# Altium PCB roneCPUBoard-v9.PcbDoc (part 2 of 3)
Units mil, origin at the board's own origin, x right, y up, seen from the top; angles counter-clockwise.
Board outline 3914.93 x 3914.93 mil, 2 copper layers (Top Layer, Bottom Layer); 178 components, 153 nets, 717 pads, 391 vias.
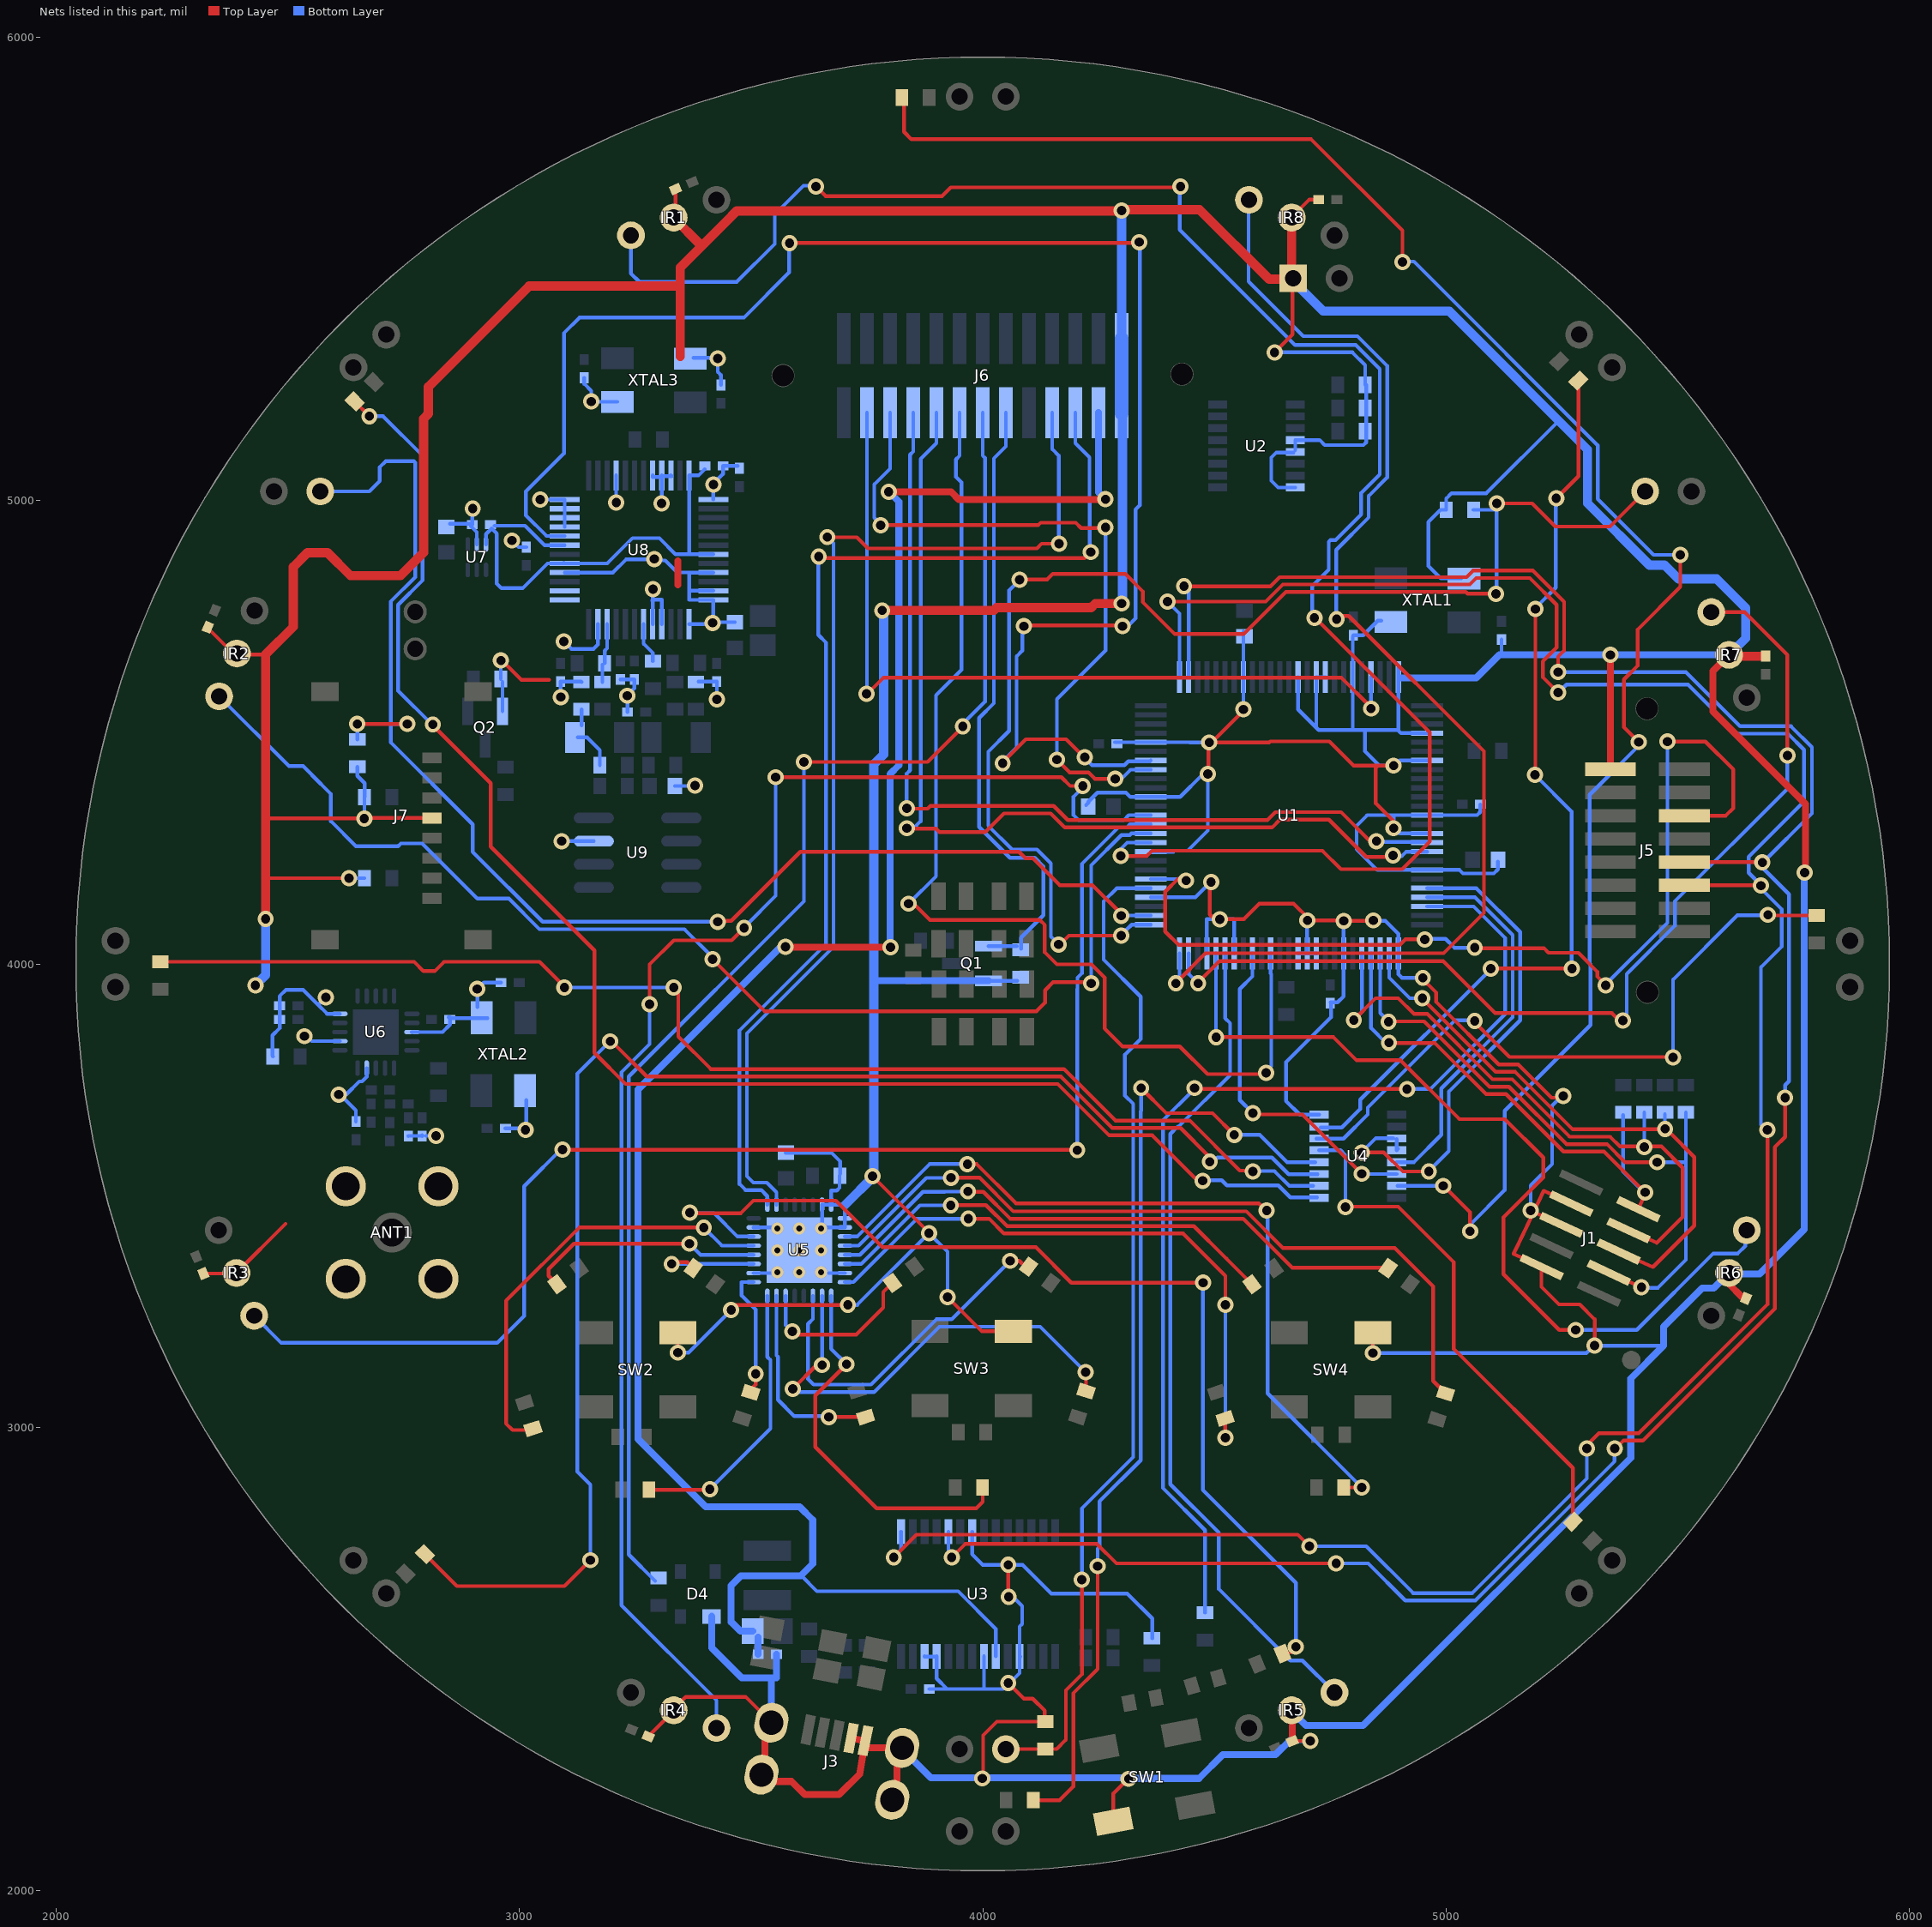
[diagram p2: the nets of this part, all layers, seen from the top]

## Via types
v1: diameter 35, hole 20, Top Layer to Bottom Layer, 374 vias
v2: diameter 25.98, hole 12.99, Top Layer to Bottom Layer, tented top, 13 vias
v3: diameter 110, hole 89, Top Layer to Bottom Layer, 2 vias
v4: diameter 250, hole 89, Top Layer to Bottom Layer, 2 vias

## Nets (pads, with @x,y where several pads share a name; then routed paths per layer and width w, separated by ;. In a path a pad name is that pad's centre, name@x,y a point inside that pad or via, vN(x,y) a via of type N, cw(c..) or ccw(c..) an arc to the next point about the centre after c; other vN are vias at no path point) (continued)
5VUSB: C9.2 J6.24 L1.2 U3.20 | length 4523.3
  Top Layer w15: v1@3575,4036 v1(3801,4036) ; v1(3797,5019) 3932,5019 3948.5,5002.5 v1@4255,5002.5
  Bottom Layer w8: 3607,2681 3608,2680 3642,2646 3947,2646 4028.39,2564.61 U3.20@4028.39,2505.55
  Bottom Layer w15: 3457,2579 3457,2580 ; L1.2@3503.5,2560 3477,2560 3457,2580 ; C9.2@3515.31,2510 L1.2@3515.31,2546.69 ; v1(3574,4037) 3564,4037 3256,3729 3256,2974.33 3402.33,2828 3605,2828 3633,2800 3633,2705 3608,2680 3607,2679 3478,2679 3457,2658 3457,2580 ; v1@3797,5020 3819,4998 3819,4429 3800,4410 3800,4044 3795,4039 3798,4036 v1(3801,4036) ; J6.24@4250,5189.98 4250,5018 v1@4260,5008
  other v1: 4265,5003
ADC_EXPAND: J5.11 U1.6 | length 2158.9
  Top Layer w8: 4421.91,4184 4394,4156.09 4394,4070 4423,4041 4900,4041 4912,4053 4953,4053 4954,4054 v1(4954,4053) ; v1@5064,4034 5211.37,4034 5221.37,4024 5286,4024 5326.5,3983.5 5326.5,3973 v1@5345,3954.5 ; v1(5478,4480) 5560,4480 5620,4420 5620,4336 5604,4320 J5.11@5515.02,4320
  Bottom Layer w8: U1.6@4362.77,4183.2 v1@4433.2,4183.2 ; v1@4433.41,4183 v1@4440,4183 ; v1@4956,4054 4999,4054 5018,4035 v1(5062,4035) ; v1@5344,3954 5344,3955 5478,4089 v1(5478,4480)
  other v1: 5345,3954 4439,4180
CHRG: J6.14 R17.1 | length 3024.4
  Top Layer w8: v1@3612,4436 3881,4436 v1@3958,4513
  Bottom Layer w8: R17.1@3293,2668 3236,2725 3236,3757 3614,4135 3614,4435 v1@3615,4436 ; v1@3957,4514 3957,4518.25 4005,4566.25 4005,5092 4000,5097 J6.14@4000,5189.98
  other v1: 3614,4436 3957,4513
CHRGEN: J6.12 U1.90 | length 2404.3
  Top Layer w8: v1(3840,4130) 3851,4130 3886,4095 4123,4095 4134,4084 4134,4025 4160,3999 4234.72,3999 4263.5,3970.22 4263.5,3860.5 4302,3822 4425.28,3822 4485.28,3762 4609,3762 v1(4612,3765)
  Bottom Layer w8: v1(3840,4130) 3899,4189 3899,4580 3954,4635 3954,5039.28 3942,5051.28 3942,5089 3950,5097 J6.12@3950,5189.98 ; v1(4612,3765) 4610.28,3766.72 4623,3779.43 4623,3978.25 4621.63,3979.62 U1.90@4621.63,4022.77
CVDD: C31.2 C32.2 U7.3 U8.5 U8.7 U8.24 U8.31 | length 1072.9
  Bottom Layer w8: U7.3@2927.69,4905.56 2927.69,4927.69 2940,4940 2951,4929 2951,4821 2961,4811 3007,4811 3060.47,4864.47 U8.5@3097.57,4864.47 ; C32.2@2946,4946 3012,4946 3054.16,4903.84 U8.7@3097.57,4903.84 ; U8.5@3095.79,4866.25 U8.5@3097.57,4864.47 ; 3366.27,4886.27 U8.24@3366.27,5054.43 3386.43,5054.43 C31.2@3400,5068 ; U8.31@3418.43,4884.16 3336.84,4884.16 3302,4919 3244,4919 3189.47,4864.47 U8.5@3097.57,4864.47
DREQ: U1.19 U8.8 | length 3635.7
  Top Layer w8: v1(3583,5556) v1@4347,5556 ; v1(4043,4433) 4043,4435 4093,4485 4180,4485 v1@4220,4445 ; v1@4090,4731 4301.56,4731 4302,4730.56 v1(4302,4729)
  Bottom Layer w8: U8.8@3097.57,4923.53 3058.47,4923.53 3014,4968 3014,5020 3096,5102 3096,5361.63 3129.37,5395 3484.37,5395 3582,5492.63 3582,5557 v1(3583,5556) ; v1(4043,4433) 4043,4437 4073,4467 4073,4663.83 4085.5,4676.33 4085.5,4725.5 v1(4089,4729) ; v1@4219,4446 4236,4429 4306,4429 4314.33,4437.33 4360.99,4437.33 U1.19@4362.77,4439.11 ; v1@4313.56,4729.56 4330,4746 4330,4980.88 4339,4989.88 v1@4339,5555
  other v1: 4220,4446 4338,5558
FTDI_RX: J5.5 U1.26 U3.1 | length 5671.5
  Top Layer w8: v1(3808,2719) 3857,2768 4680,2768 v1(4705,2743) ; v1(4399,4782) 4610.75,4782 4647.75,4819 5051.25,4819 5065.25,4833 5181,4833 5239,4775 5239,4683 5209,4653 5209,4619 v1(5242,4586) ; v1(5304,2954) 5304,2961 5330,2987 5416,2987 5694,3265 v1(5694,3642) ; J5.5@5515.02,4170 v1@5680,4170
  Bottom Layer w8: v1@3807,2719 3823.66,2735.66 U3.1@3823.66,2774.45 ; v1(4399,4782) 4424.78,4756.22 U1.26@4424.78,4619.23 ; v1(4705,2743) 4828,2743 4929,2642 5056.8,2642 5304,2889.2 v1@5304,2955 ; v1(5242,4586) 5243,4586 5260,4603 5522.37,4603 5628.37,4497 5738.26,4497 5773,4462.26 5773,4350.72 5653.5,4231.22 5653.5,4196.5 v1@5681,4169 ; v1@5692,4169 v1(5680,4169) 5680,4162.72 5724.5,4118.22 5724.5,4037.28 5680,3992.78 5680,3653 5691,3642 v1(5694,3642)
FTDI_TX: J5.7 U1.27 U3.5 | length 5478.7
  Top Layer w8: v1(3933.02,2718.98) 3962,2748 4246.72,2748 4288.72,2706 v1(4763,2706) ; v1(4434.5,4815.5) 4438,4819 4442,4815 4621.12,4815 4641.12,4835 5044.63,4835 5058.63,4849 5187.63,4849 5255,4781.63 5255,4676.37 5242,4663.37 v1(5242,4630) ; v1(5364,2954) 5365,2953 5383,2971 5425,2971 5710,3256 5710,3604.63 5732,3626.63 v1(5732,3711) ; J5.7@5515.02,4220 5682,4220 v1(5683,4219)
  Bottom Layer w8: U3.5@3926.02,2774.45 3926.02,2718.98 v1(3933.02,2718.98) ; v1(4434.5,4815.5) 4444.46,4805.54 U1.27@4444.46,4619.23 ; v1(4763,2706) 4832,2706 4912,2626 5063.42,2626 5364,2926.58 v1(5364,2954) ; v1(5242,4630) 5518,4630 5635,4513 5744.89,4513 5790,4467.89 5790,4325 v1@5684,4219 ; v1(5683,4219) 5683,4207.72 5740.5,4150.22 5740.5,3747 5732,3738.5 v1(5732,3711)
GBUF: R47.1 U8.42 | length 88.4
  Bottom Layer w8: U8.42@3267.84,4733.57 3267.84,4691.16 3288,4671 R47.1@3288,4653.53
GND: ANT1.2 ANT1.3 ANT1.4 ANT1.5 C1.1 C2.1 C3.1 C4.1 C5.1 C6.1 C7.1 C8.1 C9.1 C10.1 C11.1 C12.1 C13.1 C14.1 C15.1 C16.1 C17.1 C18.1 C19.1 C21.1 C23.1 C24.1 C25.1 C26.1 C27.1 C28.1 C29.1 C30.2 C31.1 C32.1 C33.2 C34.1 C36.1 C37.1 C38.2 C39.2 C40.2 C41.2 C42.1 C43.2 C46.1 D4.1 IR1.2 IR2.2 IR3.2 IR4.2 IR5.2 IR6.2 IR7.2 IR8.2 J1.3 J1.5 J1.9 J3.4 J3.5 J3.6 J3.7 J3.8 J3.9 J4.1 J5.16 J6.25 J6.26 J7.4 Q1.2 Q2.2 R2.1 R3.1 R10.1 R11.1 R12.1 R18.1 R32.1 R33.1 R39.2 R40.2 R41.2 R43.1 R54.1 R55.1 R57.1 SW1.2 SW2.2 SW3.2 SW4.2 U1.4 U1.9 U1.15 U1.21 U1.33 U1.39 U1.41 U1.42 U1.45 U1.50 U1.54 U1.57 U1.63 U1.65 U1.69 U1.76 U1.82 U1.85 U1.86 U1.87 U1.94 U1.97 U2.4 U2.5 U2.8 U3.7 U3.18 U3.21 U3.25 U3.26 U4.8 U5.1 U5.2 U5.7 U5.18 U5.23 U5.31 U5.32 U5.33 U6.8 U6.14 U6.17 U6.20 U7.2 U8.4 U8.9 U8.10 U8.11 U8.12 U8.16 U8.20 U8.21 U8.22 U8.25 U8.33 U8.35 U8.36 U8.37 U8.40 U8.41 U8.47 U9.7 XTAL1.2 XTAL1.4 XTAL2.2 XTAL2.4 XTAL3.2 XTAL3.4 | length 31835.3
  Top Layer w8: C13.1@2317.53,3331.81 IR3.2@2385.81,3331.81 ; C12.1@2327.47,4724.53 2382,4670 2385.27,4670.73 2389,4667 2389.5,4668.5 IR2.2@2390,4670 ; IR3.2@2389,3333 2495,3439 ; IR2.2@2391,4668 2452,4668 2455,4668 ; 2453,4185 v1(2632,4185) ; 2455,4314 v1(2665,4314) 2665.88,4314.88 J7.4@2811.02,4314.88 ; v1@2960,4661 2960,4657 3004,4613 3064,4613 ; C14.1@3278.19,2332.47 IR4.2@3330,2384.28 ; IR4.2@3331,2390 3359,2418 3488.07,2418 J3.6@3543.89,2362.17 ; IR1.2@3336.81,5613.81 C11.1@3336.81,5672.47 ; v1(3342,3161) SW2.2@3342,3198 ; v1(3457,3253) 3468,3264 v1(3709,3264) ; J3.4@3715.93,2329.04 J3.4@3715.93,2347 ; v1(3762,3542) 3885,3419 v1(3884,3419) ; v1(3924,3281) 3998,3207 SW3.2@4066,3207 SW3.2@4068,3207 ; v1@4001,2251 4001,2335 4030.53,2364.53 R41.2@4135,2364.53 ; v1(4055,2448) 4089,2414 4108,2414 4134,2388 R41.2@4134,2365 ; v1(4055,2703) 4055,2635 v1(4056,2634) ; SW1.2@4281.75,2149.42 4281.75,2209.25 v1@4314.5,2242 ; v1@4487,4406 v1@4487,4480 ; v1@4488,4478 v1(4489,4478) v1@4494,4478 ; v1(4493,4177) 4492,4177 4490,4175 4490,4107 v1@4503,4094 ; v1(4512,4096) 4513,4097 4564,4097 4597,4130 4671,4130 v1@4705,4096 ; v1(4562.57,4549.43) 4562.57,4546.57 v1@4494,4478 ; v1(4630,5320) 4669,5359 4669,5479 J4.1@4669,5481 ; C15.1@4662,2323 v1(4707,2323) ; IR8.2@4667,5612 4705,5650 C17.1@4725.32,5650 ; v1@4702,4094 4778,4094 v1(4779.11,4092.89) v1@4844.11,4092.89 ; v1(4842,3160) SW4.2@4842,3204 ; v1@4887,4298 4887,4308 4848.5,4346.5 4848.5,4423.5 4853,4428 ; v1@4887,4422 v1(4887,4428) 4853,4428 ; v1(4950,3970) 4947,3970 4979,3938 4979,3917.88 5113.88,3783 5156.14,3783 5227.77,3711.36 5246.36,3711.36 5250,3715 v1(5253,3715) ; v1(5183,3468) 5183,3473 v1@5189.98,3466.02 ; v1@5190,3464 J1.5@5249.27,3436.78 ; v1@5191,3465 v1@5189.98,3466.02 ; J1.9@5206,3345 5206,3303 5244,3265 5289,3265 5321,3233 v1(5321,3176) ; J1.9@5206.68,3345.44 5206.29,3345.62 5146,3374 5189.2,3464.38 5189.45,3464.92 v1@5189.98,3466.02 ; J1.3@5270.57,3482.46 5211,3510 v1@5189.98,3466.02 ; v1@4494,4478 4618.28,4478 4620.78,4480.5 4748.22,4480.5 4800.72,4428 4853,4428
  Top Layer w15: 3342,4818 3342,4870 ; J3.7@3522.3,2250.06 J3.7@3523,2250.06 ; J3.6@3523,2341.28 3530,2348.28 3530,2239 3533.5,2235.5 3587.08,2235.5 3615.58,2207 3690,2207 3734,2251 3746.75,2322.51 J3.5@3746.86,2323.09 3746.86,2307.83 J3.9@3815,2307.83 ; J3.4@3715.93,2329.04 J3.5@3744,2323 ; J3.8@3805,2195.71 J3.8@3804.52,2195.71 3815,2206.2 J3.9@3815,2307.83 ; J3.9@3826.11,2307.83 J3.9@3815,2307.83 ; v1@4301,5625 v1@4301,5628 ; C15.1@4668,2329 IR5.2@4668,2390 ; J5.16@5354.98,4420 v1(5355,4667) ; IR7.2@5608,4664 5576,4632 5576,4545 5776,4345 v1@5776,4191 ; IR6.2@5611,3333 5611,3309 5639,3281 C16.1@5646,3281
  Top Layer w20: v1(2452,4097) 2452,4668 2512,4728 2512,4857 2542.5,4887.5 2585.7,4887.5 2635.2,4838 2743,4838 2793,4888 2793,5176.8 2803.5,5187.3 2803.5,5245.5 3021,5463 3347,5463 ; IR1.2@3333,5610 3390,5553 ; 3347,5311 3347,5463 ; v1(3783,4763) 4024,4763 4030,4769 4234,4769 4243,4778 v1(4300,4778) ; v1@4301,5625 3469,5625 3445.27,5601.27 3347,5503 3347,5463 ; v1@4301,5628 4468,5628 4618,5478 J4.1@4667,5478 ; IR8.2@4655,5611 IR8.2@4667,5611 J4.1@4667,5478 ; J4.1@4670,5480 4669,5479 4667,5477 J4.1@4667,5478 ; IR7.2@5608,4664 C18.1@5682,4664
  Bottom Layer w8: IR3.2@2385.81,3331.81 2386.59,3332.1 IR3.2@2389,3333 ; R43.1@2467.47,3800 2467,3803 2467,3846 2482.31,3861.31 C28.1@2482.31,3880 C21.1@2482.31,3910 2482.31,3930.31 2496,3944 2533,3944 2566,3911 ; v1(2536,3844) 2539,3846 2551.68,3833.32 U6.17@2612.24,3833.32 ; v1(2582,3928) 2566,3912 2566,3911 ; v1(2610,3718) 2626,3718 2654.51,3746.51 2660.2,3746.51 2670.31,3756.62 U6.14@2670.31,3775.24 ; U6.20@2612.24,3892.37 2584.63,3892.37 2566,3911 ; v1@2614,3717 2647,3684 C23.1@2647,3659.69 ; v1(2632,4185) R2.1@2665.47,4185 ; R39.2@2650,4425.47 2650,4406 2666,4390 R3.1@2666,4361 ; v1@2665.47,4318.53 R3.1@2665.47,4360 ; C24.1@2760,3628.32 2760,3629 2789,3629 2790,3630 C25.1@2790,3628.32 ; U6.8@2768.76,3852 U6.8@2767.76,3853 2834,3853 2850,3869 C29.1@2850,3885 ; C25.1@2798,3629 v1(2820,3629) ; C29.1@2846.68,3885 2851.68,3883 XTAL2.4@2931,3883 ; C30.2@2850,4950 2897,4950 C32.1@2898.32,4948.68 ; v1(2899,4983) 2898.32,4974.32 C32.1@2898.32,4948.68 ; U7.2@2908,4905.56 2908,4932 2895.16,4944.84 C32.1@2898.32,4948 C32.1@2898.32,4948.68 ; XTAL2.4@2909,3907 v1(2909,3946) 2923,3960 C26.1@2960.31,3960 ; R57.1@2959.53,4615 v1@2959.53,4650.53 ; Q2.2@2963.4,4545.43 R57.1@2963.4,4608.6 ; C27.1@2969.68,3645 v1@3008,3645 ; v1(2984,4914) 2998.31,4899.69 C37.1@3015,4899.69 ; v1@3014.74,3654.74 XTAL2.2@3014.74,3706.26 ; v1(3044.73,5002.27) U8.12@3097.57,5002.27 U8.9@3097.57,4943.21 ; v1(3089,4576) C38.2@3089,4609.31 3132.69,4609.31 R54.1@3134,4608.53 ; v1(3091,4265) U9.7@3160.51,4265 ; v1(3096,4696) 3112,4680 3160,4680 3169.42,4689.42 U8.47@3169.42,4733.57 ; U8.4@3097.57,4844.79 3201.79,4844.79 3230,4873 3289,4873 v1(3291,4874) 3292.5,4871 3314.72,4871 3340.72,4845 3366.27,4845 3366.27,4844.79 ; C43.2@3140,5265.31 3140,5252 3155,5237 v1@3155,5217 ; v1@3155.74,5213.26 XTAL3.2@3211.26,5213.26 ; U8.16@3208.79,5054.43 3208.79,4999.21 3209,4999 v1(3209,4996) ; C42.1@3218,4614.32 C34.1@3246.69,4614.32 ; C40.2@3233.31,4544 3233.31,4573.69 v1(3233,4579) 3233,4580 3248,4595 C34.1@3248,4614.32 ; U8.41@3287.53,4733.57 3287.53,4783.73 ; U8.20@3287.53,5054.43 3288,5051 3307,5051 3307,5054.43 U8.21@3307.21,5054.43 ; v1(3288,4809) 3287.53,4804.47 3287.53,4789 3287,4783.73 3287.53,4783.73 ; v1(3307,4994) 3307.21,4994 U8.21@3307.21,5054.43 ; U8.40@3307.21,4733.57 3307.21,4785.79 3307,4786 3287.53,4786 3287.53,4783.73 ; U8.22@3326.9,5054.43 3328.68,5053 3308.65,5053 U8.21@3307.21,5054.43 ; C46.1@3335.56,4384 3378,4384 v1(3379,4385) ; v1(3342,3161) 3365,3161 v1(3457,3253) ; U8.37@3366.27,4733.57 3415.57,4733.57 3418,4737 3418,4737.56 C33.2@3465,4737.56 ; XTAL3.4@3376,5308 3428,5308 3428,5278 3435,5271 C41.2@3435,5249.69 ; R55.1@3386.31,4609.31 C39.2@3426,4609.31 v1(3426,4571) ; v1(3417,4736.13) 3418.43,4737.57 U8.36@3418.43,4785.73 3366.73,4785.73 3366.73,4805.42 ; U8.35@3418.43,4805.42 3366.73,4805.42 ; U8.33@3418.43,4844.79 3366.27,4844.79 ; U8.25@3418.43,5002.27 3418.43,5028.43 v1(3419,5035) 3419,5037 3439.69,5057.69 C31.1@3439.69,5075 C36.1@3471,5075 ; U5.18@3505.57,3332.79 U5.33@3555.79,3332.79 ; U5.23@3505.57,3431.21 U5.33@3544.79,3431.21 ; C19.1@3575,3592.56 3673.44,3592.56 3692,3574 R33.1@3692,3547 ; U5.33@3653.21,3443.79 U5.31@3653.21,3480.43 ; U5.31@3655.57,3480.43 U5.32@3672.9,3480.43 ; U5.33@3662.21,3431.21 U5.2@3702.43,3431.21 ; U5.33@3667.79,3332.79 U5.7@3702.43,3332.79 ; R33.1@3691,3543 3691,3517 3684.9,3510.9 3672.9,3510.9 U5.32@3672.9,3480.43 ; U5.2@3702.43,3431.57 U5.1@3702.43,3450.9 3702.43,3478.43 ; 3703.57,3480.43 3703.43,3480.43 U5.32@3672.9,3480.43 ; v1(3709,3264) 3729,3264 v1(3884,3419) 3924,3379 v1(3924,3281) ; v1(3762,3542) v1@3765,3542 ; U3.26@3874.84,2505.55 3874.84,2505 U3.25@3900.43,2505 ; C10.1@3884.69,2435 4044,2435 4053,2444 4058,2445 v1(4055,2448) ; U3.25@3900.43,2505.55 U3.25@3900.43,2505 ; 3923,2435 3900.43,2457.57 U3.25@3900.43,2505 ; U3.7@3977.2,2774.45 3977.2,2725.8 4000,2703 4086,2703 4148,2641 4312,2641 4366,2587 R18.1@4366,2544 ; 4002.8,2435 U3.21@4002.8,2505.55 ; Q1.2@4012.43,3963.6 R32.1@4074.6,3963.6 ; v1(4056,2634) 4058,2634 4061,2631 4068,2631 4085,2614 4085,2575.28 4079.57,2569.85 U3.18@4079.57,2505.55 ; v1@4059.57,2449 4079.57,2469 4079.57,2503.57 U3.18@4081,2505 ; C7.1@4223,4343 4228,4348 4228,4350.28 4247.44,4369.72 4309.28,4369.72 4318.63,4360.37 4426.37,4360.37 4474,4408 v1@4484,4408 ; C1.1@4285.52,4478.48 4446.52,4478.48 ; U1.4@4362.77,4143.83 4451.17,4143.83 ; U1.9@4362.77,4242.26 4412.01,4242.26 ; 4414.25,4244.5 4442.5,4244.5 4486,4288 v1@4486,4408 ; 4447,4478 v1(4489,4478) ; 4453,4144 4459,4144 4492,4177 v1(4493,4177) ; U1.97@4483.83,4022.77 4483.83,4097 v1@4513,4097 ; v1(4512,4096) v1@4513,4097 ; U1.94@4542.89,4022.77 4542.89,4096.11 4542,4097 v1@4513,4097 ; v1(4562.57,4549.43) C3.1@4562.57,4717.57 ; v1(4630,5320) 4798,5320 4825.53,5292.47 R12.1@4825.53,5250 ; IR5.2@4667,2389 4667.93,2388.36 4668.19,2388.19 IR5.2@4668.19,2385.81 ; IR8.2@4667,5611 IR8.2@4667,5612 ; 4671,2323 4668.19,2322.53 4707.47,2322.53 v1(4707,2323) ; U2.5@4671,5104 4634,5104 4623,5093 4623,5043 4637.57,5028.43 U2.8@4674.66,5028.43 ; U2.5@4674.66,5109.34 U2.4@4674.66,5130.8 4727.2,5130.8 4738,5120 4822,5120 4828,5126 R12.1@4828,5250 ; U1.87@4680.69,4022.77 U1.86@4700.37,4022.77 ; 4680.69,4549.31 4725,4505 4798.8,4505 ; 4680.69,4551.06 U1.39@4680.69,4619.23 ; v1@4700.37,4090.37 U1.86@4700.37,4022.77 ; U1.85@4720.06,4022.77 U1.86@4700.37,4022.77 ; 4720.06,4510.06 U1.41@4720.06,4619.23 ; U1.41@4721.77,4619.23 U1.42@4739.74,4619.23 ; U4.8@4726.34,3674.57 4684.43,3674.57 4655,3704 4655,3788 4752,3885 C2.1@4752,3912 ; C2.1@4751,3917 4766,3917 4779.11,3930.11 v1(4779.11,4092.89) ; v1(4842,3160) 5303,3160 v1@5319,3176 ; v1@4843,4093 4869,4093 4897.22,4064.78 4897.22,3977.78 4905,3970 v1(4950,3970) ; XTAL1.4@4860,4741 4853,4741 4821.31,4709.31 C5.1@4800,4709.31 4798.8,4704.8 4798.8,4505 ; v1@4887,4309 4887,4321 ; 4897,4507 4897,4505 ; 4897.22,4505 U1.50@4897.22,4644 ; v1@4900,4281.63 U1.65@4959.23,4281.63 ; 4900.5,4439.5 v1@4900.11,4439.11 ; U1.57@4959.23,4439.11 v1@4900.11,4439.11 ; U1.54@4959.23,4498.17 4902.83,4498.17 4897,4504 4897,4505 ; XTAL1.2@5033,4832 4989,4832 4962,4859 4962,4954 4988,4980 R40.2@5000.47,4980 5000.47,5004.47 5012,5016 5087,5016 5243,5172 ; C8.1@5074,4344 5074,4328 5067,4321 U1.63@4959.23,4321 4887,4321 ; C4.1@5112,4221 5112,4204 5103.28,4195.28 5036.72,4195.28 5029.11,4202.89 4851.74,4202.89 4807,4247.63 4807,4298 4830,4321 4887,4321 ; 5120,4670 C6.1@5120,4700.31 ; v1(5183,3468) 5183,3522 5229,3568 5229,3694 5250,3715 v1(5253,3715) ; v1(5321,3176) 5470,3176 ; IR6.2@5611,3333 IR6.2@5613,3331 ; 3366.27,4844.79 3366.27,4805.42 3366.73,4805.42 ; 4798.8,4505 4825,4505 ; 4825,4505 4825,4459 4856,4428 4883,4428 4886,4425 v1(4887,4428) v1@4900.11,4439.11 ; 4825,4505 4897,4505
  Bottom Layer w15: D4.1@3415,2591.77 3415,2524 3480,2459 3554.68,2459 C9.1@3554.68,2510 ; J3.6@3543.89,2362.17 3543.89,2459 ; 3703,3480 3703.43,3480.43 ; 3767.4,3963.6 Q1.2@4012.43,3963.6 ; J3.9@3825,2306 3888,2243 4313,2243 v1(4315,2241) ; v1@4314.5,2242 4467,2242 4518,2293 4632,2293 4668,2329 IR5.2@4668,2384 ; IR5.2@4667,2387 4668.19,2385.81 4698,2356 4821,2356 5399,2934 5399,3105 5470,3176 5470,3217 5553,3300 5578,3300 IR6.2@5611,3333 ; U1.50@4902,4617 5065,4617 5115,4667 v1(5355,4667) IR7.2@5611,4667 ; IR6.2@5610,3331 5613,3331 5677,3331 5773,3427 v1@5773,4195
  Bottom Layer w20: v1(2430,3954) 2452,3976 v1(2452,4097) ; 3703.43,3480.43 3765,3542 3765,4431 3786,4452 v1@3786,4763 ; J6.26@4300,5189.98 4301.5,5188.48 v1@4301.5,4779.5 ; J6.25@4300,5350.02 v1(4300,5626) v1@4300,5632 ; J4.1@4670,5480 4670,5474 4735,5409 5006.77,5409 5305.5,5110.27 5305.5,4994.5 5439,4861 5471.89,4861 5501.89,4831 5584,4831 5647,4768 5647,4703 IR7.2@5619,4675
  Bottom Layer w29.12: J6.26@4300,5187.98 J6.26@4300,5189.98 J6.25@4300,5350.02
  other v1: 3999,2242 3013,3642 4701,4094 4843,4094 5774,4197 4887,4293 4486,4410 2960,4655 3155,5214 3428,5307
  other v2: 3556.76,3334.76 3604,3334.76 3651.24,3334.76 3556.76,3382 3604,3382 3651.24,3382 3556.76,3429.24 3604,3429.24 3651.24,3429.24
I2C_SCL: J6.22 U5.25 | length 2440.4
  Top Layer w8: v1@3643.51,4874.49 3645.03,4876 4220,4876 v1(4233,4889)
  Bottom Layer w8: 3475,3559 3475,3560 ; U5.25@3535.1,3480.43 3535.1,3498.9 3522,3512 3488,3512 3475,3525 3475,3560 ; v1(3646,4879) 3645,4878 3645,4710.35 3662,4693.35 3662,4043.63 3475,3856.63 3475,3560 ; J6.22@4200,5189.98 4200,5124 4230.5,5093.5 4230.5,5019.72 4230.5,4995.28 4231,4994.78 4231,4891 4230.5,4890.5 4231.5,4890.5 v1(4233,4889)
I2C_SDA: J6.20 U5.26 | length 2351.1
  Top Layer w8: v1@3667,4921 3728.37,4921 3752.37,4897 4117,4897 4127,4907 v1@4148,4907
  Bottom Layer w8: U5.26@3554.79,3480.43 3554.79,3507.22 3534,3528 3505,3528 3491,3542 3491,3850 3678,4037 3678,4908 v1@3664,4922 ; J6.20@4150,5189.98 4150,5111.35 4164,5097.35 v1@4164,4908
  other v1: 4165,4907 3664.5,4921.31
IR_CLK: U1.71 U4.11 U4.12 | length 1113.2
  Top Layer w8: v1(4818,3593) 4866,3593 4907,3552 v1(4963,3552)
  Bottom Layer w8: v1(4818,3593) 4818,3601 4825.72,3601 4848.72,3624 U4.11@4886,3624 ; U4.11@4893.66,3621.66 U4.12@4893.66,3597.8 U4.12@4897,3601.13 ; U1.71@4959.23,4163.52 5065.48,4163.52 5160,4069 5160,3878.37 5006,3724.37 5006,3596 4964,3554 v1@4963,3554
IR_DATA: U1.92 U4.14 | length 730.5
  Top Layer w8: v1@4583,3675 4690,3675 4815,3550 v1@4815,3540
  Bottom Layer w8: U1.92@4582.26,4022.77 4582.26,3973.26 4555,3946 4555,3706 v1(4583,3678) ; v1@4824.61,3546.61 U4.14@4893.66,3546.61
  other v1: 4818,3547
IR_EMIT_0: R24.2 U4.15 | length 4143.9
  Top Layer w8: R24.2@3825.47,5870 3830,5865.47 3830,5796 3846,5780 4709,5780 4906,5583 v1(4906,5515) ; v1@4994,3522 5052,3464 v1(5052,3423) ; v1(5416,4479) 5384,4511 5384,4614 5414,4644 5414,4722 5506,4814 v1(5506,4883)
  Bottom Layer w8: U4.15@4895.76,3521 v1(4994,3521) ; v1(4906,5515) 4905,5516 4930.89,5516 5327.5,5119.39 5327.5,5003.61 5448.11,4883 v1(5506,4883) ; v1@5053,3420 5053,3438 5127,3512 5127,3683 5312,3868 5312,3999 5310,4001 5310,4365 5420,4475 v1(5416,4479)
IR_EMIT_1: R25.2 U4.1 | length 3363.5
  Top Layer w8: R25.2@2644.12,5214.12 v1(2676,5182.24) ; v1(2813,4517) 2813,4515 2938,4390 2938,4253 3162,4029 3162,3808 3229,3741 4162.03,3741 4273.03,3630 4366,3630 4462,3534 v1@4477,3534
  Bottom Layer w8: v1(2676,5182.24) 2705.39,5182.24 2791,5096.63 2791,4828.33 2738,4775.33 2738,4589.72 v1@2811.36,4516.36 ; v1@4484,3533 4516,3533 4527,3522 4638,3522 4664,3496 U4.1@4722,3496
  other v1: 4475,3532
IR_EMIT_2: R26.2 U4.2 | length 2737.6
  Top Layer w8: R26.2@2225,4004.53 2772.75,4004.53 2792.78,3984.5 2817.22,3984.5 2837.25,4004.53 3043.47,4004.53 3086,3962 v1@3086,3954 ; v1@3343,3938 3343,3843 3413,3773 4175.28,3773 4286.28,3662 4447,3662 4555,3554 4575,3554 v1@4582,3547
  Bottom Layer w8: v1@3096,3949 v1@3327,3949 ; v1@4582,3547 4588,3553 4629.63,3553 4661.63,3521 U4.2@4713,3521
  other v1: 4583,3552 3097,3949 3333,3949
IR_EMIT_3: R27.2 U4.3 | length 3228.5
  Top Layer w8: R27.2@2795.88,2725.88 2864.76,2657 3097,2657 v1(3153,2713) ; v1@3204,3828 3275,3757 4168.65,3757 4279.65,3646 4427,3646 4487,3586 v1@4486,3568
  Bottom Layer w8: v1(3153,2713) 3153,2876 3125,2904 3125,3763 v1@3203,3841 ; v1@4496,3571 4507,3582 4624.37,3582 4660.37,3546 U4.3@4723,3546
  other v1: 4490,3573 3196,3833
IR_EMIT_4: R28.2 U4.4 | length 2107.5
  Top Layer w8: R28.2@4109.53,2195 4166,2195 4195.49,2224.49 4195.49,2425.49 4248,2478 v1@4248,2699 ; v1(4342,3732) 4396,3678 4496,3678 v1(4543,3631)
  Bottom Layer w8: v1@4247,2700 4248,2701 4248,2738 4252,2742 4252,2839.86 4341,2928.86 4341,3681.88 4342,3682.88 4342,3730 v1@4343,3731 ; v1(4543,3631) 4598,3631 4657,3572 U4.4@4718,3572
  other v1: 4248,2700
IR_EMIT_5: R29.2 U4.5 | length 1117.5
  Top Layer w8: v1@4785,3476 4897,3476 5017,3356 5017,3169 5274.12,2911.88 R29.2@5274.12,2795.88
  Bottom Layer w8: U4.5@4726.34,3597.8 4772.2,3597.8 4783,3587 v1@4783,3479
  other v1: 4783,3475
IR_EMIT_6: R30.2 U4.6 | length 1473.9
  Top Layer w8: v1@5061,3875 5137,3799 5477,3799 5489,3787 v1@5489,3790 ; v1@5701,4104.53 R30.2@5800,4104.53
  Bottom Layer w8: U4.6@4720,3623 4779,3623 4831,3675 4831,3690 5019,3878 v1@5062,3878 ; v1@5489,3790 5489,3787 5490,3788 5490,3966 5629,4105 v1@5701,4105
  other v1: 5490,3798 5062,3877 5695,4106
IR_EMIT_7: R31.2 U4.7 | length 2026
  Top Layer w8: v1(5097,3990) v1@5255.75,3990 ; v1(5192,4408) 5193,4409 v1(5193,4766) ; v1(5238,5005) 5240,5005 5240,5015 5248,5015 5285.88,5052.88 R31.2@5285.88,5259.12
  Bottom Layer w8: U4.7@4730,3647 4775,3647 4815,3687 4815,3707 v1@5097.5,3989.5 ; v1(5192,4408) 5271,4329 v1@5271,3989 ; v1(5193,4766) 5193,4768 5237,4812 v1@5237,5004
  other v1: 5272,3990
IR_RECV_0: IR1.1 U1.10 | length 4054.1
  Top Layer w8: v1(3640,5678) 3661,5657 3912,5657 3931,5676 v1@4434,5676 ; v1(4298,4233) 4354,4233 4365.5,4244.5 4733.22,4244.5 4773.22,4204.5 4905.5,4204.5 4965,4264 4965,4500 v1@4711,4754
  Bottom Layer w8: IR1.1@3240.61,5572.73 3240.61,5490.39 3259,5472 3469,5472 3551,5554 3551,5618 3613,5680 v1@3647,5680 ; v1@4298,4248 4311.94,4261.94 U1.10@4362.77,4261.94 ; v1@4425,5676 4425,5585 4674,5336 4805.37,5336 4857,5284.37 4857,5056.63 4817,5016.63 4817,4970.37 4761.63,4915 4750.63,4915 4747,4911.37 4747,4851 4711,4815 v1@4711,4754
  other v1: 4716,4747 4427,5678
IR_RECV_1: IR2.1 U1.11 | length 2660.4
  Top Layer w8: v1(3417,4010) 3529,3898 4116,3898 4134.5,3916.5 4134.5,3943.22 4151.78,3960.5 v1@4231.5,3960.5
  Bottom Layer w8: IR2.1@2351.73,4577.61 2502.34,4427 2533,4427 2552,4408 2552,4407.72 2593,4366.72 2593,4308 2647,4254 2738,4254 2744,4260 2790,4260 2909,4141 2977.12,4141 3043.12,4075 3356,4075 v1@3422,4009 ; v1@4235,3958 4234,3959 4234,4213 4299.28,4278.28 4317.54,4278.28 4320.88,4281.63 U1.11@4362.77,4281.63
  other v1: 4234,3958
IR_RECV_2: IR3.1 U1.12 | length 2949.3
  Top Layer w8: v1@3091,3599 v1@4203,3599
  Bottom Layer w8: IR3.1@2427.27,3240.61 2485.88,3182 2952,3182 3010,3240 3010,3520 v1@3095,3605 ; v1(4204,3598) 4204,3945.28 4204.5,3945.78 4204.5,3970.22 4214,3979.72 4214,4215.63 4292.66,4294.28 4310.91,4294.28 4317.94,4301.31 U1.12@4362.77,4301.31
  other v1: 3093,3599
IR_RECV_3: IR4.1 U1.13 | length 3262.2
  Top Layer w8: v1@3281,3914 3281,3999 3333,4051 3458,4051 v1(3485,4078) ; v1(3553,4403) 4170,4403 4189,4384 4212,4384 4216,4380 v1(4216,4384)
  Bottom Layer w8: v1@3281,3912 3281,3827 3220,3766 3220,2616 3425.39,2410.61 IR4.1@3425.39,2350.73 ; v1@3489,4083 3553,4147 v1(3553,4403) ; v1@4214.5,4383.5 4214.5,4379.5 4196,4361 4196,4321 4206.72,4310.28 4304.28,4310.28 4315,4321 U1.13@4362.77,4321
  other v1: 3281,3913
IR_RECV_4: IR5.1 U1.95 | length 1816.8
  Bottom Layer w8: U1.95@4523.2,4022.77 4523.2,3882.8 4534,3872 4534,3760 4423,3649 4421,3649 4405,3633 4405,2877 4509.72,2772.28 4509.72,2650.56 4663.78,2496.5 4690.16,2496.5 IR5.1@4759.39,2427.27
IR_RECV_5: IR6.1 U1.96 | length 1964.6
  Top Layer w8: v1(4504,3842) 4757,3842 4807,3792 4902,3792 5029,3665 5127,3665 5210,3582 5210,3539 5124,3453 5124,3330.26 5244.26,3210 v1(5280,3210)
  Bottom Layer w8: U1.96@4503.52,4022.77 4503.52,3842.48 v1(4504,3842) ; v1(5280,3210) 5412,3210 5577,3375 5630,3375 5646,3391 5646,3422.12 IR6.1@5649.27,3425.39
IR_RECV_6: IR7.1 U1.99 | length 2214.2
  Top Layer w8: v1(4465,3958) 4465,3960 4511,4006 4994,4006 5106,3894 5358,3894 v1@5382,3870 ; IR7.1@5572.73,4759.39 5644.61,4759.39 5737,4667 v1(5737,4450)
  Bottom Layer w8: U1.99@4444.46,4022.77 4444.46,3978.54 v1(4465,3958) ; v1@5382,3870 5390,3878 5390,3978.37 5494,4082.37 5494,4135 5737,4378 v1(5737,4450)
  other v1: 5382,3878
IR_RECV_7: IR8.1 U1.100 | length 2756.5
  Top Layer w8: v1@4416,3958 4481,4023 4995,4023 5082,4110 5082,4459 4790,4751 4757,4751 v1(4764,4744)
  Bottom Layer w8: v1@4417,3959 4424.78,3966.78 U1.100@4424.78,4022.77 ; IR8.1@4567.73,5649.27 IR8.1@4574.61,5649.27 4574,5648.66 4574,5473 4692,5355 4809,5355 4873,5291 4873,5050 4833,5010 4833,4963.75 4763,4893.75 4763,4757 4757,4751 v1(4764,4744)
  other v1: 4417,3958
JTAG_TCK: J1.4 R5.1 U1.80 | length 1362.4
  Top Layer w8: v1(4801,3879) 4848,3926 4897,3926 4931,3892 4959.63,3892 5100.63,3751 5142.88,3751 5266.88,3627 5354.25,3627 5375.25,3606 5465,3606 5511,3560 5511,3454 5455,3398 J1.4@5394.03,3424.89
  Bottom Layer w8: v1(4801,3879) 4818.48,3896.48 U1.80@4818.48,4022.77 ; v1@5428,3601 R5.1@5428,3679.47
  other v1: 5428,3605
JTAG_TDI: J1.8 R7.1 U1.78 | length 1438.3
  Top Layer w8: v1@4876,3876 4953,3876 5094,3735 5136.25,3735 5260.25,3611 5347.63,3611 5386.63,3572 5454,3572 v1@5456,3570 ; J1.8@5351.43,3333.54 v1@5420,3303
  Bottom Layer w8: U1.78@4857.85,4022.77 4857.85,3894.15 v1@4876,3876 ; v1@5421,3301 5457.75,3301 5518,3361.25 5518,3572 ; v1(5456,3572) 5518,3572 ; R7.1@5518,3679.47 5518,3572
  other v1: 5422,3302 4876,3875
JTAG_TDO: J1.6 R6.1 U1.77 | length 1283
  Top Layer w8: v1(4949,3926) 4949,3925.25 5107.25,3767 5149.51,3767 5273.51,3643 5465,3643 5472.5,3635.5 5473,3636 v1(5473,3644) ; J1.6@5372.73,3379.22 5447,3346 5536,3435 5536,3583 5483,3636 v1@5474,3636
  Bottom Layer w8: U1.77@4877.54,4022.77 4877.54,3970.46 4922,3926 v1(4949,3926) ; R6.1@5472.5,3675.5 5472.5,3635.5 5473,3636 v1(5473,3644)
JTAG_TMS: J1.2 R4.1 U1.79 | length 1123.9
  Top Layer w8: v1@4871,3829 4976.49,3829 5086.49,3719 5129.63,3719 5253.63,3595 5341,3595 v1@5429,3507 ; J1.2@5415.32,3470.56 v1@5430,3504
  Bottom Layer w8: U1.79@4838.17,4022.77 4838.17,3861.83 v1@4871,3829 ; R4.1@5382,3674 5382,3552 5427,3507 v1(5430,3507)
  other v1: 4877,3830
LED_BLUE_0: D14.2 U5.3 | length 1730.4
  Top Layer w8: v1(3967,3568) 3987,3568 4072,3483 4596,3483 4611,3468 v1@4611,3464 ; D14.2@4779.53,2870 v1@4814,2870
  Bottom Layer w8: U5.3@3702.43,3411.53 3729.02,3411.53 3885.49,3568 v1(3967,3568) ; v1@4615,3463 4615,3073 v1(4818,2870)
  other v1: 4613,3468
LED_BLUE_1: D15.2 U5.4 | length 1669.8
  Top Layer w8: v1(3931.5,3538.5) 3993.38,3538.5 4065.88,3466 4569.01,3466 4648.01,3387 4889.3,3387 4972.18,3304.12 4972.18,3100.03 D15.2@4999.12,3073.08
  Bottom Layer w8: U5.4@3702.43,3391.84 3731.96,3391.84 3878.12,3538 3925.65,3538 3926.15,3538.5 v1(3931.5,3538.5)
LED_BLUE_2: D16.2 U5.5 | length 1300.2
  Top Layer w8: v1@3968,3508 4001.25,3508 4059.25,3450 4562.38,3450 4668.2,3344.18 4874.29,3344.18 D16.2@4875.11,3343.36 D16.2@4874,3341
  Bottom Layer w8: U5.5@3702.43,3372.16 3734.9,3372.16 3870.75,3508 3918.28,3508 3918.78,3508.5 3967.5,3508.5 v1(3968,3509)
LED_BLUE_3: D17.2 U5.6 | length 1019.7
  Top Layer w8: v1(3931,3479) 3930.5,3479.5 4007.13,3479.5 4052.63,3434 4456,3434 4522,3368 ; 4526,3364 4522,3368 ; D17.2@4573.47,3301 D17.2@4581.11,3308.64 4522,3367.75 4522,3368
  Bottom Layer w8: U5.6@3702.43,3352.47 3737.84,3352.47 3864.37,3479 v1(3931,3479)
LED_BLUE_4: D18.2 U5.8 | length 1316.8
  Top Layer w8: v1(3969,3450) 4014,3450 4046,3418 4432.63,3418 4524,3326.63 v1(4524,3264) ; v1@4523.12,2981.12 D18.2@4523.12,3018.92
  Bottom Layer w8: U5.8@3702.43,3313.1 3721.1,3313.1 3857.5,3449.5 3968.5,3449.5 v1(3969,3450) ; v1(4524,2977) v1(4524,3264)
LED_GREEN_0: D19.2 U5.9 | length 818.9
  Top Layer w8: v1(3706,3136) 3638.5,3068.5 3638.5,2957.5 3771,2825 3986,2825 4000,2839 D19.2@4000,2868
  Bottom Layer w8: U5.9@3672.9,3283.57 3672.9,3169.1 v1(3706,3136)
LED_GREEN_1: D20.2 U5.10 | length 1009.1
  Top Layer w8: v1(3590,3083) 3641.21,3134.21 v1(3653.21,3134.21) ; v1(4222,3119) 4223.12,3117.88 D20.2@4223.12,3078.08
  Bottom Layer w8: v1(3590,3083) 3597,3076 3765.63,3076 3906.63,3217 4124,3217 v1(4222,3119) ; v1(3653.21,3134.21) U5.10@3653.21,3283.57
LED_GREEN_2: D21.2 U5.11 | length 780.8
  Top Layer w8: v1(4059,3359) 4079,3359 4091.64,3346.36 D21.2@4099.11,3346.36
  Bottom Layer w8: U5.11@3633.53,3283.57 3633.53,3233.53 3623,3223 3623,3104 3635,3092 3759,3092 3900,3233 3933,3233 v1(4059,3359)
LED_GREEN_3: D22.2 U5.14 | length 370.1
  Top Layer w8: v1@3589,3205 v1(3589,3207) ; v1@3589,3206 3595,3200 3727,3200 3785.23,3258.23 3785.23,3291.77 D22.2@3805.11,3311.64
  Bottom Layer w8: U5.14@3574.47,3283.57 3574.47,3220.53 v1@3589,3206
LED_GREEN_4: D23.2 U5.15 | length 445.6
  Top Layer w8: v1(3668,3022) 3661,3022 3661.08,3021.92 D23.2@3747.12,3021.92
  Bottom Layer w8: U5.15@3554.79,3283.57 3554.79,3154.84 3558,3151.63 3558,3059 3593,3024 3661,3024 3661,3022 v1(3668,3022)
LED_HEARTBEAT: R8.1 U1.73 | length 2296.2
  Top Layer w8: v1@4453,3730 v1@4914,3730
  Bottom Layer w8: v1@4457,3725 4452,3725 4389,3662 4389,2869 4480,2778 R8.1@4480,2599.53 ; v1@4915,3730 4966,3730 5128,3892 5128,4055.75 5059.6,4124.15 U1.73@4959.23,4124.15
  other v1: 4916,3730 4457,3732
LED_IR_BEACON: J6.16 Q1.1 R32.2 | length 1351.1
  Bottom Layer w8: Q1.1@4012.43,4038.4 R32.2@4073.6,4038.4 ; J6.16@4050,5189.98 4050,5117 4024,5091 4024,4562.63 3992,4530.63 3992,4295.65 4058.65,4229 4112.37,4229 4131,4210.37 4131,4105 4083,4057 R32.2@4083,4033
LED_IR_COMMS: U1.72 U4.13 | length 834.4
  Bottom Layer w8: U4.13@4893.66,3572.2 4931.2,3572.2 4990,3631 4990,3731 5144,3885 5144,4062.37 5062.54,4143.83 U1.72@4959.23,4143.83
LED_MSP430: D29.2 U5.22 | length 2230
  Top Layer w8: v1@3372,3462 3478,3462 3505,3489 3683,3489 3783.5,3388.5 4114.8,3388.5 4191.3,3312 v1@4477,3312 ; v1@4664,2514 v1(4676,2526)
  Bottom Layer w8: v1@3369,3462 3420,3462 3470.47,3411.53 U5.22@3505.57,3411.53 ; v1@4473,3308 4475,3306 4475,2865 4676,2664 v1(4676,2526)
  other v1: 4476,3312 3368,3463
LED_RED_0: D24.2 U5.16 | length 606.6
  Top Layer w8: D24.2@3279.53,2865 3410,2865 v1(3411,2866)
  Bottom Layer w8: v1(3411,2866) 3542,2997 3542,3145 3535.1,3151.9 U5.16@3535.1,3283.57
LED_RED_1: D25.2 U5.17 | length 282.4
  Top Layer w8: D25.2@3495,3077 3510,3092 v1(3510,3115)
  Bottom Layer w8: 3479.1,3284.1 3479.1,3284.9 ; U5.17@3505.57,3313.1 3479.1,3313.1 3479.1,3284.9 ; v1(3510,3115) 3510,3254 3479.1,3284.9
LED_RED_2: D26.2 U5.19 | length 221.7
  Top Layer w8: v1@3336,3356.47 3362.47,3356.47 ; 3362.23,3356.23 D26.2@3375.11,3343.36
  Bottom Layer w8: v1(3328.53,3352.47) U5.19@3505.57,3352.47
LED_RED_3: D27.2 U5.20 | length 514.6
  Top Layer w8: D27.2@3081.11,3308.64 3063,3326.76 3063,3341.37 3117.63,3396 v1@3366,3396 ; v1@3366.89,3396.31 v1(3367,3396)
  Bottom Layer w8: v1(3367,3396) 3390.84,3372.16 U5.20@3505.57,3372.16
LED_RED_4: D28.2 U5.21 | length 938.8
  Top Layer w8: D28.2@3023,2994 2985,2994 2971,3008 2971,3273 3129,3431 v1(3398,3431)
  Bottom Layer w8: v1(3398,3431) 3437,3392 U5.21@3505.42,3392
LEFT: R45.1 R49.1 U8.46 | length 124.6
  Bottom Layer w8: R49.1@3179,4608.53 R45.1@3179,4646 ; R45.1@3183.53,4649 3184,4649 3184,4676 3189.1,4681.1 U8.46@3189.1,4733.57
LEFT_OUT: C44.1 R50.1 R54.2 | length 125.9
  Bottom Layer w8: C44.1@3126,4489 3146,4489 3173.47,4461.53 R50.1@3173.47,4429 ; C44.1@3134,4515 R54.2@3134,4549.47
LIGHT_B: R37.1 R41.1 U1.5 | length 2173.4
  Top Layer w8: R37.1@4052.47,2305.47 R41.1@4135,2305.47 4159.47,2305.47 4179.49,2325.49 4179.49,2432.12 4214,2466.63 v1(4214,2671)
  Bottom Layer w8: v1(4214,2671) 4214,2824.49 4325,2935.49 4325,3698 4307,3716 4307,3804 4341,3838 4341,3929.28 4261,4009.28 4261,4135 4289.52,4163.52 U1.5@4362.77,4163.52
LIGHT_FL: R35.1 R39.1 U1.2 | length 3015.4
  Top Layer w8: v1(2650,4518) v1(2758,4518) ; v1(3428,4091) 3428,4093 3457,4093 3606,4242 4078.37,4242 4092.37,4228 4108.37,4228 4166.37,4170 4237,4170 4303,4104 v1@4303,4102
  Bottom Layer w8: R35.1@2570,5020 2676,5020 2698.5,5042.5 2698.5,5072.5 2711,5085 2772,5085 2775,5082 2775,4834.95 2722,4781.95 2722,4478.25 2899,4301.25 2899,4241.75 3049.75,4091 v1(3428,4091) ; R39.1@2650,4484.53 v1(2650,4518) ; 2723,4518 v1(2758,4518) ; v1@4299.46,4104.46 U1.2@4362.77,4104.46
  other v1: 4299,4104
LIGHT_FR: R36.1 R40.1 U1.1 | length 2904.9
  Top Layer w8: v1(4079.5,4829.5) 4080,4830 4139.28,4830 4151.28,4842 4307.63,4842 4345.5,4804.13 4345.5,4781.13 4414.63,4712 4563.37,4712 4654.37,4803 5042.6,4803 5046.6,4799 v1@5110,4799 ; v1(4164,4042) 4164,4039 4186,4061 v1(4299,4061) ; v1(5110,4994) 5116.5,5000.5 5123,4994 5186,4994 5236,4944 5354,4944 R36.1@5430,5020
  Bottom Layer w8: v1(4079.5,4829.5) v1@4080,4829 ; v1@4080,4837 v1@4080,4829 ; v1(4164,4042) 4147,4059 4147,4217 4117,4247 4063.28,4247 4012,4298.28 4012,4458 4057,4503 4057,4806 v1@4080,4829 ; v1@4297,4061 4310.5,4074.5 4311.22,4074.5 4321.5,4084.78 U1.1@4362.77,4084.78 ; R40.1@5059.53,4980 v1@5110,4980 ; v1@5109.5,4800.5 v1@5109.5,4994
  other v1: 5108,4799
MICN: U8.2
MICP: U8.1
MOT0_PWMA: J6.4 U1.47 | length 1809.3
  Top Layer w8: v1(3749,4583) 3750,4582 3786,4618 4774,4618 4838,4554 4838,4552 v1@4837,4551
  Bottom Layer w8: v1@3750,4583 J6.4@3750,5189.98 ; v1(4838.17,4551.17) U1.47@4838.17,4619.23
MOT0_PWMB: J6.6 U1.18 | length 1528.5
  Top Layer w8: v1@3782,4947 4119.65,4947 4125.15,4952.5 4200.85,4952.5 4212.35,4941 v1@4259,4941 ; v1(4160,4441) 4187.5,4413.5 4228.22,4413.5 4242.22,4399.5 v1(4286,4399.5)
  Bottom Layer w8: v1@3790.5,4938.5 3766,4963 3766,5035 3800,5069 J6.6@3800,5189.98 ; v1(4160,4441) 4160,4571.5 4265,4676.5 v1@4265,4938 ; v1(4286,4399.5) 4286.5,4400 4299.63,4400 4319.05,4419.43 U1.18@4362.77,4419.43
  other v1: 4265,4942 3780,4947
MOT1_PWMA: J6.8 U1.66 | length 2033.5
  Top Layer w8: v1@3837,4335 3881,4335 3887,4341 4153.25,4341 4183.75,4310.5 4614.5,4310.5 4631.5,4327.5 4773.5,4327.5 4840,4261 4844,4265 v1(4850,4265)
  Bottom Layer w8: v1@3836,4345 3836,4411 3843,4418 3843,5099 3850,5106 J6.8@3850,5189.98 ; v1@4841.5,4263.5 4957.67,4263.5 U1.66@4959.23,4261.94
  other v1: 3836,4336
MOT1_PWMB: J6.10 U1.67 | length 2143.8
  Top Layer w8: v1@3836,4292 3899,4292 3906.33,4284.67 4005.33,4284.67 4045.65,4325 4146.63,4325 4177.13,4294.5 4624.5,4294.5 4641.5,4311.5 4747.5,4311.5 4828,4231 4886,4231 4893,4224 4893,4233 4892,4234 v1(4886,4234)
  Bottom Layer w8: v1@3851,4293 3866,4308 3866,5090 3900,5124 J6.10@3900,5189.98 ; v1(4886,4234) 4892,4234 4893,4233 4905,4233 4914.26,4242.26 U1.67@4959.23,4242.26
  other v1: 3836,4293